# Altium PCB GWNv3_Station.PcbDoc
Units mil, origin at the board's own origin, x right, y up, seen from the top; angles counter-clockwise.
Board outline 3000 x 2400 mil, 2 copper layers (Top Layer, Bottom Layer); 56 components, 56 nets, 275 pads, 98 vias.
Unrouted connection lines stored in the file: 1.
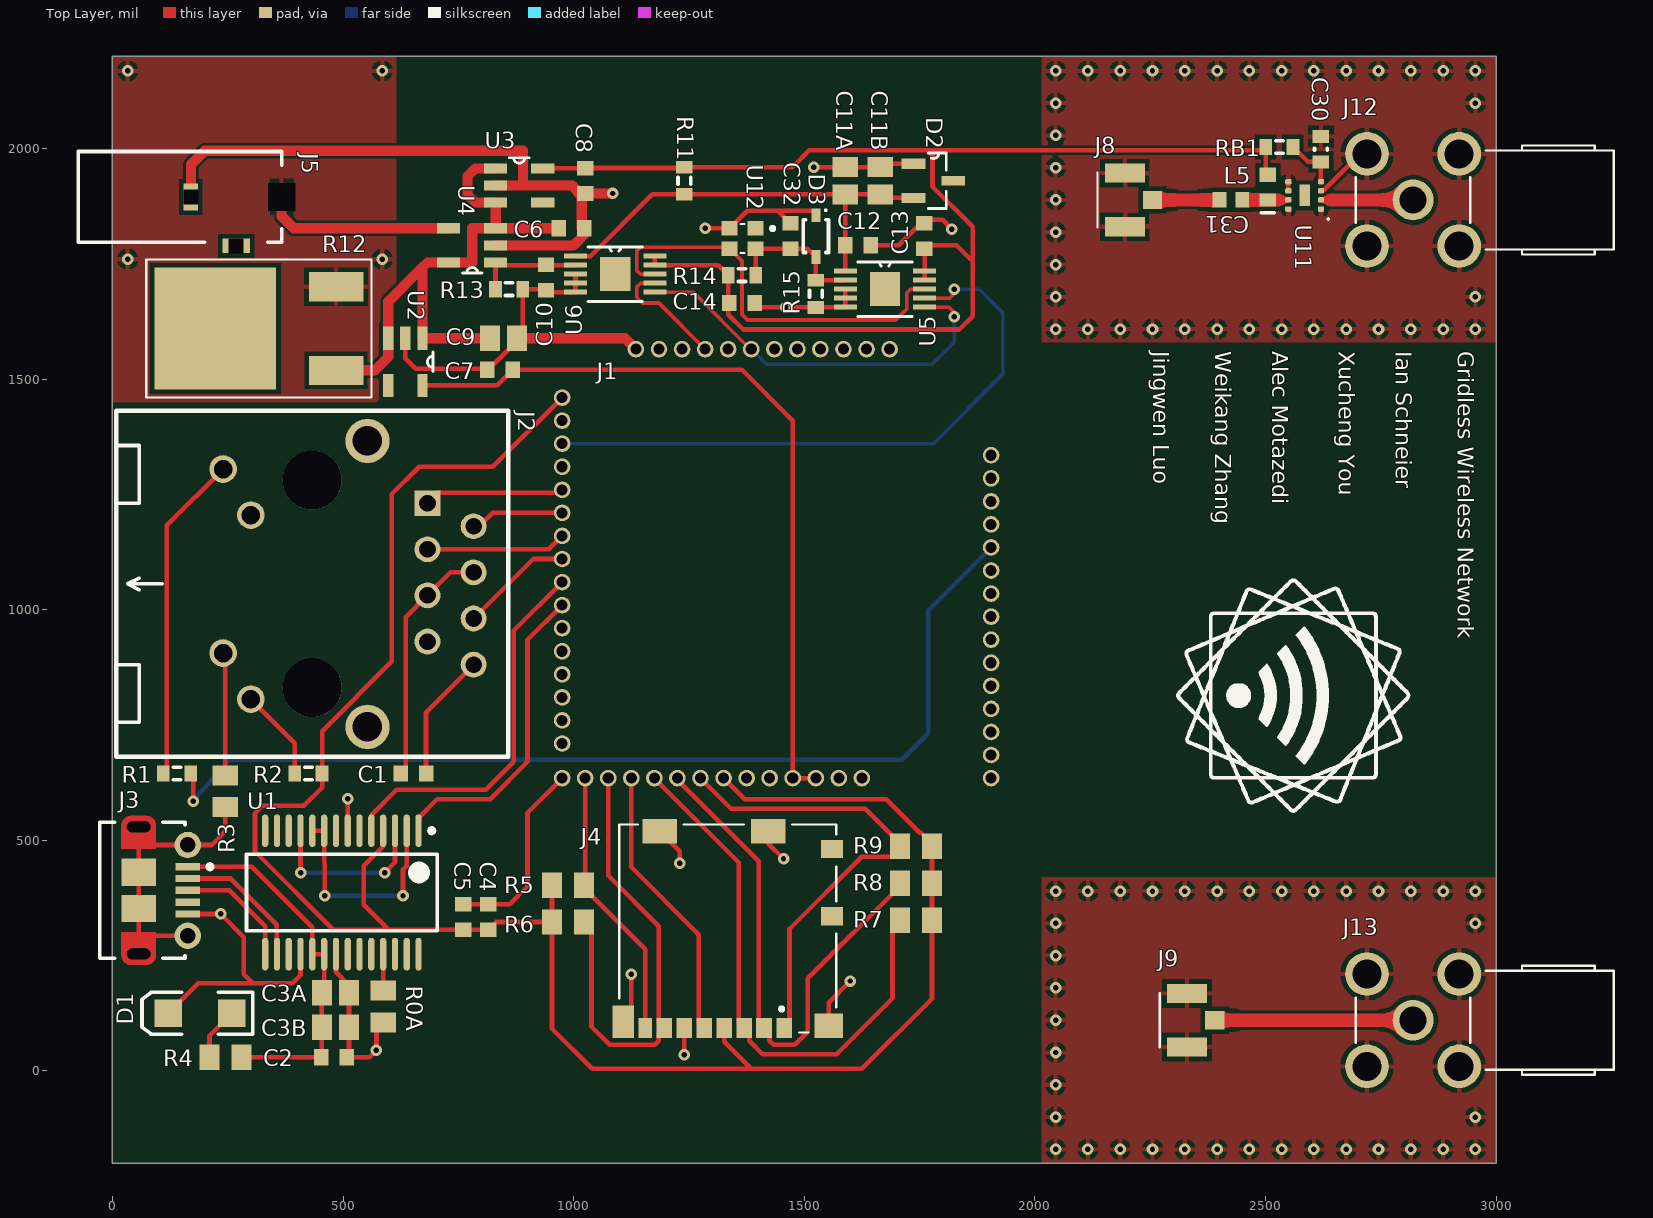
[diagram p0: Top Layer view]
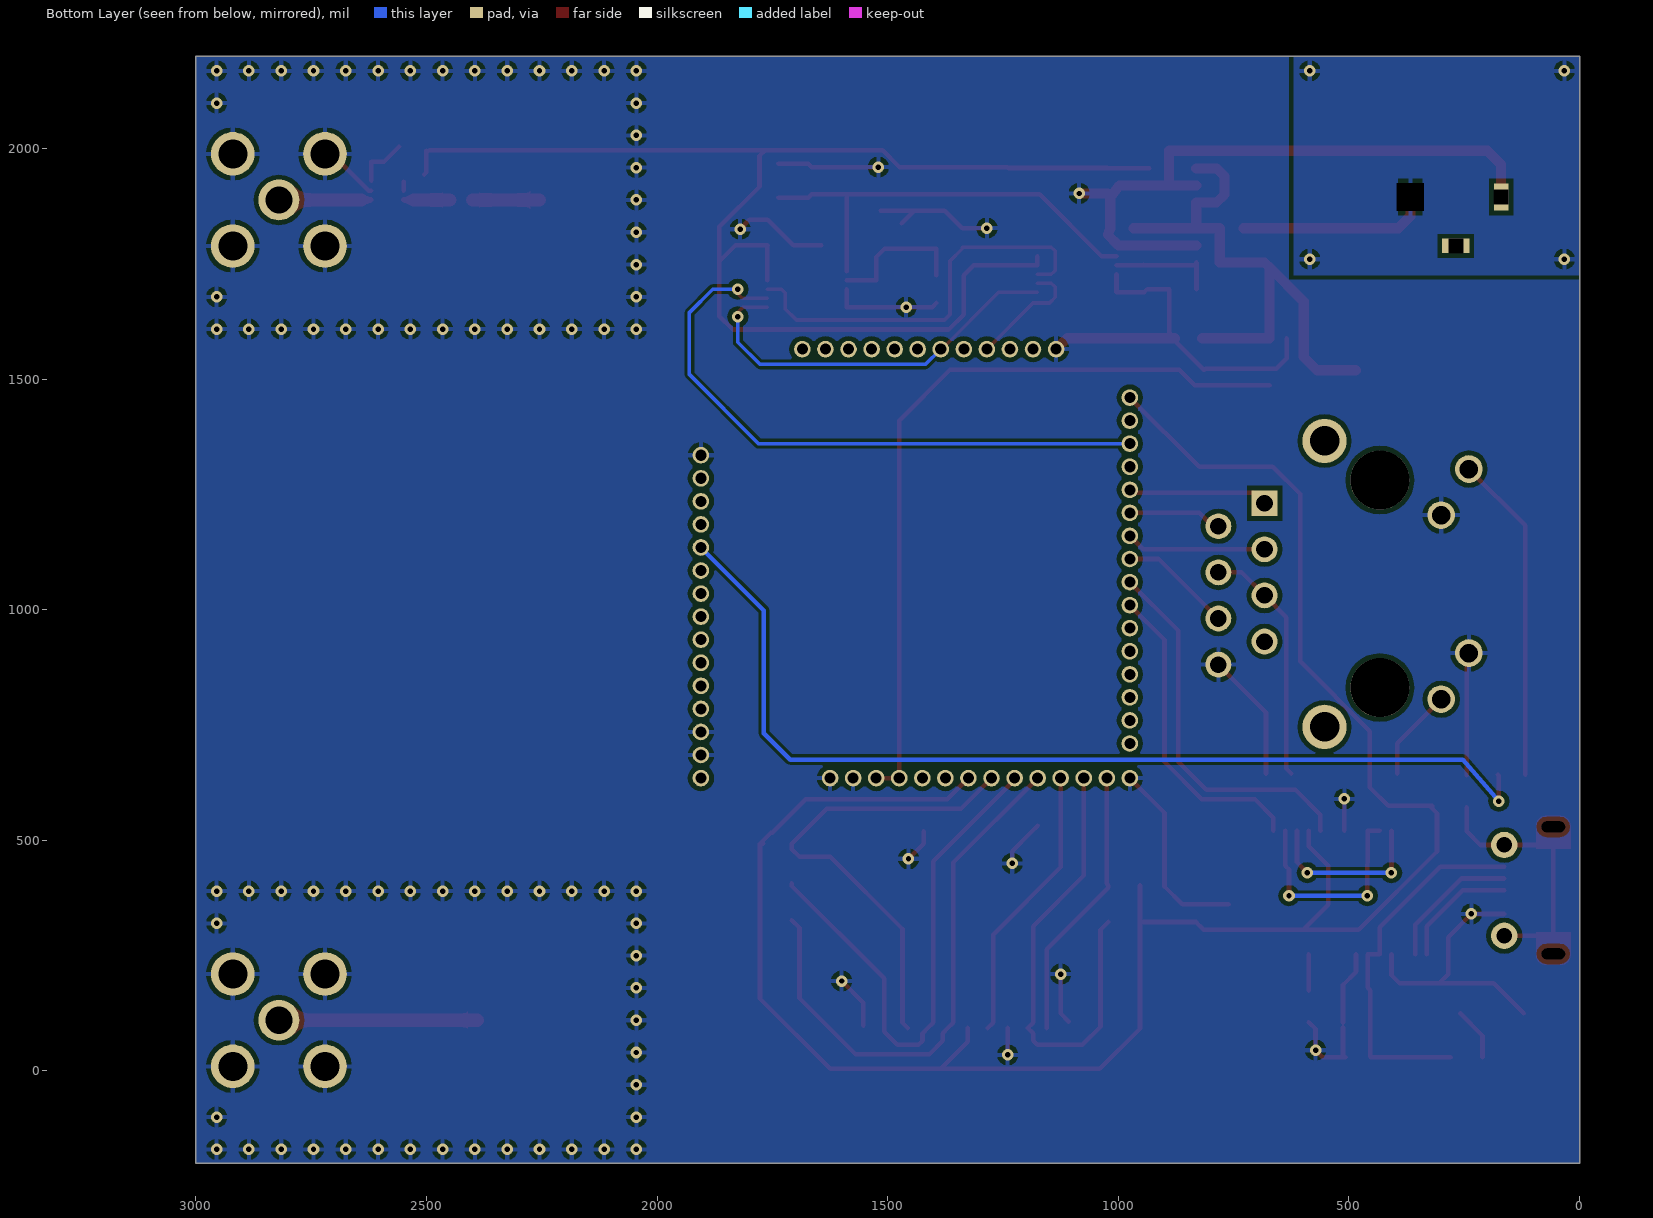
[diagram p1: Bottom Layer view, seen from below]

## Layer stack, top to bottom
Top Solder: solder mask 0.4, Solder Resist, Dk 3.5
Top Layer: signal copper 1.4
Dielectric 1: dielectric 12.6, FR-4, Dk 4.8
Bottom Layer: signal copper 1.4
Bottom Solder: solder mask 0.4, Solder Resist, Dk 3.5

## Board outline
0,-200 3000,-200 3000,2200 0,2200

## Design rules (kind name [scope] priority, off if disabled: settings)
Clearance [All] p1: gap=10 ignorepadtopadclearanceinfootprint=TRUE except(0: Arc-Hole Track-Hole SMDPad-Hole THPad-Hole Via-Hole Fill-Hole Poly-Hole Region-Hole Text-Hole; 1: SMDPad-Text; 6: Arc-Arc Arc-Track Arc-SMDPad Arc-THPad Arc-Via Arc-Fill Arc-Poly Arc-Region Arc-Text Track-Track Track-SMDPad Track-THPad Track-Via Track-Fill Track-Poly Track-Region Track-Text)
PolygonConnect [All] p1: connectstyle=Relief reliefconductorwidth=10 reliefentries=4 polygonreliefangle="90 Angle" airgapwidth=10
RoomDefinition Feedback [InComponentClass('Feedback')] p1: confinementstyle=ConfineIn formatcopy=TRUE lockcomponents=FALSE outline -88.09,1758.95 -88.09,2007.43 396.6,2007.43 396.6,2003.1 1863,2003.1 1863,1857 1800,1857 1800,1623 914.96,1623 914.96,1545.1 899.21,1545.1 899.21,1486.38 708,1486.38 708,1447.56 61.08,1447.56 61.08,1758.95
RoomDefinition BridgeRF [InComponentClass('BridgeRF')] p2: confinementstyle=ConfineIn formatcopy=TRUE lockcomponents=FALSE outline 1985,-200 3300,-200 3300,2200 1985,2200
RoomDefinition MCU [InComponentClass('MCU')] p3: confinementstyle=ConfineIn formatcopy=TRUE lockcomponents=FALSE outline -58.29,189.56 -58.29,578.26 -7,578.26 -7,1444.45 943,1444.45 943,1597 1937,1597 1937,592.83 1820.32,592.83 1820.32,265.12 1604.97,265.12 1604.97,31.1 539.21,31.1 539.21,-20 420.79,-20 420.79,-18.58 -7.51,-18.58 -7.51,189.56
RoutingVias [All] p1: holewidth=28 width=50 viastyle="Through Hole" minholewidth=12 minwidth=22 maxholewidth=28 maxwidth=50
SilkToSolderMaskClearance [IsPad vs IsFree] p1: minsilkscreentomaskgap=8 clearancetoexposedcopper=TRUE
SolderMaskExpansion [All] p1: expansion=4
UnRoutedNet [All] p1: checkbadconnections=TRUE
Width [All] p1: maxlimit=30 minlimit=7 preferedwidth=10
28 further rules are at their usual default settings.

## Classes and differential pairs
component class BridgeRF: C30 C31 J8 J9 J12 J13 L5 RB1 U11
component class MCU: C1 C2 C3A C3B C4 C5 D1 J1 J2 J3 J4 R0A R1 R2 R3 R4 R5 R6 R7 R8 R9 U1
component class Feedback: C6 C7 C8 C9 C10 C11A C11B C12 C13 C14 C32 D2 D3 J5 R11 R12 R13 R14 R15 U2 U3 U4 U5 U6 U12

## Components (designator, comment, footprint, x,y, rotation, side; value= is the part's Value field where it differs from the comment)
C1 "100nF" 1608[0603] 652.41,645 r0 top
C2 "100nF" 1608[0603] 480,30 r180 top
C3A "4.7uF" C0805 483.4,170 r180 top
C3B "4.7uF" C0805 483.4,95 r180 top
C4 "10nF" 1608[0603] 815,333.83 r270 top
C5 "100nF" 1608[0603] 760.59,333.83 r270 top
C6 "Cap" 1608[0603] 995,1827 r0 top value=1.0nF
C7 "Cap" 1608[0603] 840,1520 r0 top value=2.2nF
C8 "Cap" 1608[0603] 1025,1930 r90 top value=2.2nF
C9 "Cap" C0805 847.87,1588.56 r0 top value=10uF
C10 "100nF" 1608[0603] 940,1720 r90 top
C11A "Cap" C0805 1589,1930.05 r90 top value=10uF
C11B "Cap" C0805 1665,1930.05 r90 top value=10uF
C12 "Cap" 1608[0603] 1616.56,1790 r0 top value=100nF
C13 "Cap" 1608[0603] 1760,1810 r90 top value=100nF
C14 "Cap" 1608[0603] 1365,1665 r0 top value=100nF
C30 "10nF" CAPC0603(1608)100_L 2620,1998.43 r270 top
C31 "1pF" CAPC1608X90X35LL10T15 2425,1888.43 r0 top
C32 "Cap" 1608[0603] 1470,1810.31 r90 top value=100nF
D1 "LED2" 3.2X1.6X1.1 190,125 r180 top
D2 "LM4040DIM3-4_1" SOT95P237X112-3N 1780,1930 r0 top
D3 "D Zener" SODFL250X110-2N 1525,1810 r270 top
J1 "Vocore2  Mount" "Vocore2_Mount_One_Row_ No_Labels" 975,591 r0 top
J2 "J0011D01BNL" J00-00XXNL_J00-0061NL(Primary) 433,1056 r90 top
J3 "105017-0001" USB-MICRO-B_V 110.17,391.58 r270 top
J4 "104031-0811" MOLEX_104031-0811_104031-0811(Primary) 1333.98,297.94 r0 top
J5 "PJ-007" PJ-007 366.85,1895 r270 top
J8 "1909763-1" TE_1909763-1 2195,1888.43 r90 top
J9 "1909763-1" TE_1909763-1 2329.96,110 r90 top
J12 "5-1814400-1" CONN_5-1814400-1 2820,1888.43 r180 top
J13 "5-1814400-1" CONN_5-1814400-1 2820,110 r180 top
L5 "1.2nH" INDC1608L 2505,1915.98 r90 top
R0A "0" RESC2013X06N 586.98,140 r90 top
R1 "330" J1-0603 140,645 r180 top
R2 "330" J1-0603 425,645 r180 top
R3 "100" RESC2013X06N 245,606.62 r90 top
R4 "100" RESC2013X06N 245,30 r180 top
R5 "10K" RESC2012X07N_0805 987.59,403 r180 top value=10k
R6 "10K" RESC2012X07N_0805 987.59,323 r180 top value=10k
R7 "10K" RESC2012X07N_0805 1742.41,327 r0 top value=10k
R8 "10K" RESC2012X07N_0805 1742.41,407 r0 top value=10k
R9 "10K" RESC2012X07N_0805 1742.41,487 r0 top value=10k
R11 "Res3" J1-0603 1240,1930.05 r90 top value=100
R12 "0.1" TO-252-3 223.19,1609.67 r90 top
R13 "10k" J1-0603 860,1695 r0 top
R14 "15k" J1-0603 1365,1725.39 r0 top
R15 "15k" J1-0603 1525,1684.97 r90 top
RB1 "4k" J1-0603 2530,2003.43 r0 top
U1 "FT232RL-Reel" SSOP-28_L 497.41,387 r270 top
U2 "AP2204K-5.0TRG1" SOT95P280X145-5N 635,1537.56 r270 top
U3 "AP2204K-5.0TRG1" SOT95P280X145-5N 882,1920 r0 top
U4 "INA194AIDBVT" SOT95P280X145-5N 780,1790 r180 top
U5 "ADC141S628QIMMX/NOPB" SOP50P490X110-11N 1675,1695 r0 top
U6 "ADC141S628QIMMX/NOPB" SOP50P490X110-11N 1090,1727.56 r0 top
U11 "MAAL-011130" PQFN50P200X200X100_HS-9N 2585,1898.27 r180 top
U12 "SG-210STF_1.2000ML" OSCCC200X160X50 1366.38,1805 r180 top

## Footprints (in the part's own frame and the unit in brackets; to place one, negate y for a bottom-side part, rotate by r counter-clockwise, add the part's x,y. Pads: shape width x height; smd on the part's side, far side on the other; paste and mask are expansions set on the pad)
3.2X1.6X1.1 [mm] "SMT LED; 2 Flat Leads"
  rect 1.5x1.5 smd: 1(-1.75,0) 2(1.75,0)
  silkscreen extent -2.9,-1.15 3.2,1.15
1608[0603] [mm] "Chip Capacitor, Body 1.6x0.8mm, IPC High Density"
  rect 0.8x0.9 smd: 1(-0.7,0) 2(0.7,0)
  body extent -0.87,-0.48 0.87,0.48, height 1.3
C0805 [mm] "Chip Capacitor, Body 2.0x1.3mm, IPC High Density"
  rect 1.1x1.4 smd: 1(-0.75,0) 2(0.75,0)
  body extent -1.1,-0.72 1.1,0.72, height 1.4
CAPC0603(1608)100_L [mm] "Chip Capacitor, Body 1.6x0.8mm, Height 1.0mm, IPC High Density"
  rect 0.7x0.9 smd: 1(-0.7,0) 2(0.7,0)
  silkscreen extent -0.05,-0.35 0.05,0.35, body extent -0.87,-0.47 0.88,0.48, height 1
CAPC1608X90X35LL10T15 [mm] "Chip Capacitor, 2-Leads, Body 1.60x0.80mm, IPC High Density"
  rect 0.75x0.85 smd: 1(-0.625,0) 2(0.625,0)
  body extent -0.85,-0.45 0.85,0.45, height 0.9
CONN_5-1814400-1 [mm]
  round 2.4 hole 1.6: 1(2.54,2.54) 2(-2.54,2.54) 3(-2.54,-2.54) 4(2.54,-2.54)
  round 2.25 hole 1.5: 5(0,0)
  silkscreen extent -11.05,-3 3.15,3
INDC1608L [mm] "Chip Inductor, Body 1.6x0.8mm, IPC High Density"
  rect 0.723x0.9 smd: 1(-0.7,0)
  rect 0.8x0.9 smd: 2(0.7,0)
  silkscreen extent -1.4,-0.35 -1.4,0.35, body extent -0.87,-0.48 0.87,0.48, height 0.55
J00-00XXNL_J00-0061NL(Primary) [mil]
  rect 56x56 hole 36: 1(175,-250)
  round 56 hole 36: 2(125,-350) 3(75,-250) 4(25,-350) 5(-25,-250) 6(-75,-350) 7(-125,-250) 8(-175,-350)
  round 60 hole 40: 9(249,193) 10(149,133) 11(-150,193) 12(-250,133)
  round 128 hole 128 unplated: None(-225,0) None(225,0)
  round 96 hole 64: S1(-310,-120) S2(310,-120)
  silkscreen extent -375,-425 375,425
J1-0603 [mm] "Chip Resistor, Body 1.6x0.8mm, IPC High Density"
  rect 0.7x0.9 smd: 1(-0.75,0) 2(0.75,0)
  silkscreen extent -0.2,-0.35 0.2,0.35, body extent -0.85,-0.48 0.85,0.48, height 0.9
MOLEX_104031-0811_104031-0811(Primary) [mm]
  rect 0.85x1.1 smd: 1(3.105,-5.2) 3(0.905,-5.2) 4(-0.195,-5.2) 5(-1.295,-5.2) 6(-2.395,-5.2) 7(-3.495,-5.2)
  rect 0.875x1.1 smd: 2(2.005,-5.2)
  rect 0.75x1.1 smd: 8(-4.545,-5.2)
  rect 1.2x1 smd: 9(5.74,0.95) 10(5.74,4.65)
  rect 1.55x1.35 smd: G1(5.565,-5.075)
  rect 1.17x1.8 smd: G2(-5.755,-4.85)
  rect 1.9x1.35 smd: G3(-3.73,5.625) G4(2.24,5.625)
  silkscreen extent -5.97,-5.45 5.97,6
OSCCC200X160X50 [mm]
  rect 0.89x0.79 smd: 1(-0.715,-0.565) 2(0.715,-0.565) 3(0.715,0.565) 4(-0.715,0.565)
  silkscreen extent -1.75,-0.8 0.1,0.8
PJ-007 [mm]
  rect 1.5x0.8 hole 1.5 square: 1(0,0)
  rect 1.5x0.8 hole 0.8 square: 2(0,-5)
  rect 0.8x1.5 hole 0.8 square: 3(2.7,-2.5)
  silkscreen extent -2.5,-11.2 2.5,0
PQFN50P200X200X100_HS-9N [mm] "PQFN, 8-Leads, Body 2.00x2.00mm, Pitch 0.50mm, Thermal Pad 0.58x1.18mm, IPC Medium Density"
  rrect50% 0.35x0.3 smd: 1(-0.9,0.75) 2(-0.9,0.25) 3(-0.9,-0.25) 4(-0.9,-0.75) 5(0.9,-0.75) 6(0.9,-0.25) 7(0.9,0.25) 8(0.9,0.75)
  rect 0.58x1.18 smd: 9(0,0)
  silkscreen extent -1.35,1.25 -1.25,1.35, body extent -1,-1 1,1, height 0.25
RESC2012X07N_0805 [mm] "Chip Resistor, 2-Leads, Body 2.00x1.22mm, IPC Medium Density"
  rect 1.1x1.4 smd: 1(-0.875,0) 2(0.875,0)
  body extent -1.07,-0.7 1.08,0.7, height 0.65
RESC2013X06N [mm] "Chip Resistor, 2-Leads, Body 2.00x1.27mm, IPC Medium Density"
  rect 1.1x1.4 smd: 1(-0.875,0) 2(0.875,0)
  body extent -1.07,-0.7 1.08,0.7, height 0.65
SODFL250X110-2N [mm] "SODFL, 2-Leads, Body 1.25x2.50mm, IPC Medium Density"
  rect 0.75x0.5 smd: 1(-1.15,0) 2(1.15,0)
  silkscreen extent -1.47,-0.7 0.9,0.7, body extent -0.9,-0.67 0.9,0.67, height 1.1
SOP50P490X110-11N [mil]
  rect 50x11 smd: 1(-86,39) 2(-86,19.5) 3(-86,0) 4(-86,-19.5) 5(-86,-39) 6(86,-39) 7(86,-19.5) 8(86,0) 9(86,19.5) 10(86,39)
  rect 66x74 smd: 11(0,0)
  silkscreen extent -59,-59 59,59
SOT95P237X112-3N [mil]
  rect 52x22 smd: 1(-43,37) 2(-43,-37)
  rect 52x20 smd: 3(43,0)
  silkscreen extent -11,-60 28,60
SOT95P280X145-5N [mil]
  rect 50x22 smd: 1(-51,37) 2(-51,0) 3(-51,-37) 4(51,-37) 5(51,37)
  silkscreen extent -21,48 21,60
SSOP-28_L [mm] "SOP, 28-Leads, Body 10.2x5.3mm, Pitch 0.65mm, IPC High Density"
  oval 1.8x0.35 smd: 1(-3.4,4.225) 2(-3.4,3.575) 3(-3.4,2.925) 4(-3.4,2.275) 5(-3.4,1.625) 6(-3.4,0.975) 7(-3.4,0.325) 8(-3.4,-0.325) 9(-3.4,-0.975) 10(-3.4,-1.625) 11(-3.4,-2.275) 12(-3.4,-2.925) 13(-3.4,-3.575) 14(-3.4,-4.225) 15(3.4,-4.225) 16(3.4,-3.575) 17(3.4,-2.925) 18(3.4,-2.275) 19(3.4,-1.625) 20(3.4,-0.975) 21(3.4,-0.325) 22(3.4,0.325) 23(3.4,0.975) 24(3.4,1.625) 25(3.4,2.275) 26(3.4,2.925) 27(3.4,3.575) 28(3.4,4.225)
  silkscreen extent -3.52,-5.25 2.1,5.25, body extent -2.8,-5.25 2.8,5.25, height 2
TE_1909763-1 [mm]
  rect 1x1.05 smd: 1(0,-1.525)
  rect 1.05x2.2 smd: 2(-1.475,0) 3(1.475,0)
  silkscreen extent -1.5,1.5 1.5,1.5
TO-252-3 [mm]
  rect 1.6x3 smd: 1(-2.3,-6.65) 2(2.3,-6.65)
  rect 6.7x6.7 smd: PAD(0,0)
  silkscreen extent -3.8,-8.6 3.8,3.8
USB-MICRO-B_V [mm] "USB, MICRO B, Body 7.491x4.695 mm, Pitch 0.65 mm"
  rect 0.4x1.35 smd: 1(-1.3,1.35) 2(-0.65,1.35) 3(0,1.35) 4(0.65,1.35) 5(1.3,1.35)
  round 1.45 hole 0.85: 6(-2.5,1.35) 7(2.5,1.35)
  rrect50% 0x0 hole 0.6 slot 1.3 at 90 deg: 8(-3.5,-1.35) 11(3.5,-1.35)
  rect 1.5x1.9 smd: 9(-1,-1.35) 10(1,-1.35)
  Top Layer circle w0.5: c-3.6,-1.8 r0.25
  Top Layer circle w0.5: c3.6,-1.8 r0.25
  Top Layer circle w0.5: c3.6,-0.9 r0.25
  Top Layer region: -3.6,-1.8 -3.6,-0.9 -4.1,-0.9 -4.1,-1.8
  Top Layer region: 3.6,-0.9 3.6,-1.8 4.1,-1.8 4.1,-0.9
  Top Layer region: 2.3,-0.4 2.3,-2.3 3.6,-2.3 3.6,-0.4
  Top Layer region: -2.3,-2.3 -2.3,-0.4 -3.6,-0.4 -3.6,-2.3
  Top Layer lines w0.5: -3.546,-1.144 cw(c-3.6,-0.9) -3.6,-0.65 ; -3.546,-1.144 cw(c-3.6,-0.9) -3.6,-0.65 ; -3.546,-1.144 ccw(c-3.6,-0.9) -3.6,-0.65 ; -3.546,-1.144 ccw(c-3.6,-0.9) -3.437,-1.089 ccw(c-3.6,-0.9) -3.6,-0.65
  silkscreen extent -3.75,-3.5 3.75,2.7, body extent -4.1,-3.9 4.1,1.5, height 2.67
"Vocore2_Mount_One_Row_ No_Labels" [mil]
  round 36 hole 24: 1(0,869) 2(0,819) 3(0,769) 4(0,719) 5(0,669) 6(0,619) 7(0,569) 8(0,519) 9(0,469) 10(0,419) 11(0,369) 12(0,319) 13(0,269) 14(0,219) 15(0,169) 16(0,119) 17(0,44) 18(50,44) 19(100,44) 20(150,44) 21(200,44) 22(250,44) 23(300,44) 24(350,44) 25(400,44) 26(450,44) 27(500,44) 28(550,44) 29(600,44) 30(650,44) 31(930,44) 32(930,94) 33(930,144) 34(930,194) 35(930,244) 36(930,294) 37(930,344) 38(930,394) 39(930,444) 40(930,494) 41(930,544) 42(930,594) 43(930,644) 44(930,694) 45(930,744) 46(710,974) 47(660,974) 48(610,974) 49(560,974) 50(510,974) 51(460,974) 52(410,974) 53(360,974) 54(310,974) 55(260,974) 56(210,974) 57(160,974)

## Part data
C1 C2 C3A C3B C4 C5 C6 C7 C8 C9 C10 C11A C11B C12 C13 C14 C32: library part "Cap Semi", "Capacitor (Semiconductor SIM Model)", LatestRevisionDate=29-May-2009, LatestRevisionNote="IPC-7351 Footprint Added.", PackageDescription="Chip Capacitor", PackageReference=C1206, Published=8-Jun-2000, Publisher="Altium Limited"
C30: library part CMP-1035-02302-1, "CAP 10nF 6.3V ±10% 0603 (1608 Metric) Thickness 1mm SMD", Case-EIA=0603, Case-Metric=1608, Rated Voltage="6.3 V", Tolerance=±10%, Max Thickness="1 mm", Technology=SMT
C31: library part CMP-2006-02464-1, Manufacturer=Murata, Part Number=GRM1885C1H1R0CA01D
D1: "Typical RED, GREEN, YELLOW, AMBER GaAs LED", LatestRevisionDate=17-Jul-2002, LatestRevisionNote="Re-released for DXP Platform.", PackageDescription="SM LED; 2 Flat Leads", PackageReference=3.2X1.6X1.1, PackageVersion=Feb-2002, Published=8-Jun-2000, Publisher="Altium Limited"
D2: "IC VREF SHUNT 4.096V SOT23", Package="SOT23 Texas Instruments", Supplier Part Number 1=LM4040DIM3-4.1/NOPBCT-ND, Availability=Good, MF="Texas Instruments", MP=LM404DIM4-4.1, Price="0.41 USD", Supplier 1=Digi-Key
D3: "Zener Diode", LatestRevisionDate=17-Jul-2002, LatestRevisionNote="Re-released for DXP Platform.", PackageDescription="Diode, Thru-Hole; 2 Leads; 0.7 in Pin Spacing", PackageReference=DIODE-0.7, Published=8-Jun-2000, Publisher="Altium Limited"
J1: library part Vocore2_Pins
J2: "CONN MAGJACK 1PORT 100 BASE-TX", Manufacturer="Pulse Electronics Network", Supplier Part Number 1=553-1483-ND, Manufacturer Part Number=J0011D01BNL, Supplier 1=Digi-Key, URL=https://www.digikey.com/short/q8f3j9
J3: library part CMP-2000-05827-1, "Micro-USB B Receptacle, Right Angle, Bottom Mount, Surface Mount, with Solder Tabs, -30 to 85 degC, 5-Pin USB, RoHS, Tape and Reel", Manufacturer=Molex, Package Description="5-Leads USB, Micro B, Body 7.5 x 5 mm, Pitch 0.65 mm", Package Reference=MICRO-B, Package Version="Rev. F, 12/2012", Standard Package=1, Voltage - Max=30V, 3D Model=105017-0001.stp, Catalog Drawings=1050170001, Category=Connectors,Interconnects, Circuits=5, Connector Type=USB-microB, Datasheet URL=http://www.molex.com/elqNow/elqRedir.htm?ref=http://www.molex.com/webdocs/datasheets/pdf/en-us/1050170001_IO_CONNECTORS.pdf, Datasheet Version=03/2016, Family=USB,DVI,HDMIConnectors, Featured Product=Micro-USBConnectorsUSBConnectors, Features=Shielded,SolderRetention, Gender=Receptacle, Ingress Protection=-, Manufacturer URL=http://www.molex.com/, Mating Products=WM17145-ND-CABLEMICROUSBBTOSTDA1.0MWM17147-ND-CABLEMICROUSBBTOSTDA2.0MWM17146-ND-CABLEMICROUSBBTOSTDA1.5M, Mounting Technology=SurfaceMount, Mounting Type=BoardCutout,SurfaceMount,RightAngle, Number of Contacts=5, Online Catalog=Molex-MicroUSB, Other Names=WM1399DKR, Package URL=http://www.molex.com/pdm_docs/sd/1050170001_sd.pdf, Packaging=Digi-Reel®, PCN Assembly/Origin=ResinSupplier21/Oct/2015, RoHS Information=1050170001CertofCompliance, Series=-, Specifications=-
J4: "1.10mm Pitch microSD Memory Card Connector, SMT, Push-Pull Type, 1.42mm Height, with Detect Switch", Manufacturer=Molex, Supplier Part Number 1=WM6357CT-ND, Manufacturer Part Number=104031-0811, Part Number=104031-0811, Supplier=Arrow, Supplier 1=Digi-Key, URL=https://www.arrow.com/en/products/1040310811/molex?utm_source=octopart&utm_medium=aggregator&utm_campaign=octopart_2017&utm_content=inv_listing&utm_keyword=1040310811
J5: "1.3 mm Center Pin, 1.0 A, Right Angle, Through Hole, Dc Power Jack Connector", Package=None, Availability=Good, MF=CUI, MP=PJ-007, Price="0.36 USD", SnapEDA_Link=https://www.snapeda.com/parts/PJ-007/CUI/view-part/?ref=snap
J8 J9: "CONN UMCC JACK STR 50OHM SMD", Package=None, Availability=Good, MF="TE Connectivity", MP=1909763-1, Number_of_Positions=1, Price="0.28 USD"
J12 J13: "SMA R/A PCB Skt GZD", Package=None, Digi-Key_Part_Number=A97593-ND, Digi-Key_Purchase_URL=https://www.digikey.com/product-detail/en/te-connectivity-amp-connectors/5-1814400-1/A97593-ND/1755981?WT.z_cid=ref_snapeda&utm_source=snapeda&utm_medium=aggregator&utm_campaign=buynow, EU_RoHS_Compliance=Compliant, Link=http://www.te.com/usa-en/product-5-1814400-1.html, MF="TE Connectivity", MP=5-1814400-1, Number_of_Positions=1, SnapEDA_Link=https://www.snapeda.com/symbols-footprints/5-1814400-1/TE%20Connectivity%20AMP%20Connectors/view-part/?ref=snap
L5: library part Inductor, "Inductor", Manufacturer=Murata, Part Number=LQG15WH1N2S02D
R0A R1 R2 R3 R4 R5 R6 R7 R8 R9 R12 R13 R14 R15 RB1: library part Res3, "Resistor", LatestRevisionDate=29-May-2009, LatestRevisionNote="IPC-7351 Footprint Added.", PackageDescription="Chip Resistor", PackageReference=J1-0603, Published=8-Jun-2000, Publisher="Altium Limited"
R11: "Resistor", LatestRevisionDate=29-May-2009, LatestRevisionNote="IPC-7351 Footprint Added.", PackageDescription="Chip Resistor", PackageReference=J1-0603, Published=8-Jun-2000, Publisher="Altium Limited"
U1: library part CMP-0078-00029-3, "USB UART Asynchronous Serial Data Transfer Chip, 28-pin SSOP, Tape and Reel", Manufacturer=FTDI, ComponentLink1Description="Manufacturer URL", ComponentLink1URL=http://www.ftdichip.com/, ComponentLink2Description=Datasheet, ComponentLink2URL=http://www.ftdichip.com/Support/Documents/DataSheets/ICs/DS_FT232R.pdf, DatasheetVersion="ver 2.10, Mar-2012", PackageDescription="28-Pin Small Outline Package 0.65 mm Pitch", PackageReference=SSOP-28, PackageVersion=Mar-12, PartNumber=FT232RL-Reel, RevisionNote="DatasheetVersion updated to 2.10 Mar-2012"
U2 U3: "IC REG LINEAR 5V 150MA SOT23-5", Package="SOT-23-5 Diodes Inc.", Availability=Good, MF="Diodes Inc.", MP=AP2204K-5.0TRG1, Price="0.20 USD"
U4: "IC CURRENT MONITOR 3% SOT23-5", Package="SOT-23 Texas Instruments", Availability=Good, MF="Texas Instruments", MP=INA194AIDBVT, Price="1.55 USD"
U5 U6: "IC CONVERTER A/D 14-BIT 10-MSOP", Package="MSOP-10 Texas Instruments", Availability=Good, MF="Texas Instruments", MP=ADC141S628QIMMX/NOPB, Price="4.07 USD"
U12: "Spxo 1.6-3.6v 50ppm -40/+85c", Package="SMD-4 Epson", Availability=Bad, MF=EPSON, MP="SG-210STF 1.2000ML", Price="1.41 USD", SnapEDA_Link=https://www.snapeda.com/symbols-footprints/SG-210STF%201.2000ML/EPSON/view-part/?ref=snap

## Via types
v1: diameter 25, hole 11.81, Top Layer to Bottom Layer, 98 vias

## Nets (pads, with @x,y where several pads share a name; then routed paths per layer and width w, separated by ;. In a path a pad name is that pad's centre, name@x,y a point inside that pad or via, vN(x,y) a via of type N, cw(c..) or ccw(c..) an arc to the next point about the centre after c; other vN are vias at no path point)
3V3: C4.2 C5.2 J1.1 J1.24 J4.4 R2.1 R5.2 R6.2 R7.2 R8.2 R9.2 U1.4 | length 4587.1
  Top Layer w10: U1.4 586.98,486.95 545,444.97 545,360 598.73,306.27 ; R5.2 R6.2 ; J1.1 825,1310 665,1310 605.9,1250.9 605.9,888 454.53,736.62 R2.1 454.53,614.53 415,575 320,575 320,569.29 309.18,558.47 309.18,475.82 478.73,306.27 598.73,306.27 ; J1.24 1371.13,588.87 1677.97,588.87 1750.2,516.63 1753.13,516.63 1776.86,492.91 R9.2 ; J4.4 1326.31,63.69 1385,5 ; R9.2@1770.2,493.65 R9.2 ; 598.73,306.27 C5.2 C4.2 831.73,323 R6.2 ; R6.2 953.14,91.86 1040,5 1385,5 ; 1385,5 1625,5 1776.86,156.86 R7.2 R8.2 R9.2
5V_MCU: C7.2 J1.27 J1.28 U2.5 | length 1687.4
  Top Layer w10: U2.5 834.12,1486.56 C7.2 1365,1520 1475,1410 J1.27 J1.28
5V_RF: C8.2 C13.1 C14.1 L5.2 R11.2 R14.1 RB1.1 U3.5 U5.9 U5.10 U6.9 U6.10 | length 3063.6
  Top Layer w10: U3.5 1021.95,1957 1022.56,1957.61 1238.03,1957.61 R11.2 1474.58,1959.58 1511.23,1996.23 1765.98,1996.23 ; U6.9 1313.81,1747.06 R14.1 1335.47,1665 1335.47,1639.53 1367.5,1607.5 1836.39,1607.5 1865,1636.11 1865,1755 ; U6.9@1176,1748.06 U6.10 ; U5.9 U5.10 1761,1789 1760,1790 1830,1790 1865,1755 ; L5.2 2500.47,1948.07 2500.47,1995 2497.97,1992.5 2494.24,1996.23 1765.98,1996.23 ; 1765.98,1996.23 1778,1984.21 1778,1917 1865,1830 1865,1755
12V: C6.1 C9.1 R12.1 U2.1 U2.3 U3.1 U3.3 U4.3 U4.5 | length 1255.5
  Top Layer w22: R12.1 569.12,1519.12 598,1548 U2.3 598,1668 672,1742 ; C9.1 U2.1 672,1742 ; U3.1 787,1957 770,1940 770,1900 787,1883 U3.3 U4.3 ; C6.1 U4.3 ; 672,1742 683,1753 U4.5 780,1753 780,1827 U4.3
ADC_I: J1.54 U6.7 | length 259.5
  Top Layer w8: U6.7 1145.2,1708.06 1137,1699.86 1137,1677.26 1149.26,1665 1185,1665 J1.54
ADC_V: J1.3 U5.7 | length 1355.4
  Top Layer w8: U5.7 1815.5,1675.5 1825,1685 v1(1825,1695)
  Bottom Layer w8: J1.3 1780,1360 1930,1510 1930,1644.27 1879.27,1695 v1(1825,1695)
CSB: J1.52 U5.6 U6.6 | length 867.3
  Top Layer w8: U6.6 1259.57,1688.56 1383.13,1565 J1.52 ; U5.6 1814,1656 1825,1645 v1(1825,1635)
  Bottom Layer w8: J1.52 1418,1532 1777,1532 1825,1580 v1(1825,1635)
GND: C1.2 C2.1 C3A.1 C3B.1 C4.1 C5.1 C6.2 C7.1 C8.1 C9.2 C10.1 C11A.2 C11B.2 C12.2 C13.2 C14.2 C30.1 C32.2 D1.2 D2.1 D3.1 J1.17 J1.29 J1.30 J1.32 J1.33 J1.45 J1.57 J2.8 J2.10 J2.11 J3.5 J4.6 J4.G1 J4.G2 J4.G3 J4.G4 J5.2 J8.2 J8.3 J9.2 J9.3 J12.1 J12.2 J12.3 J12.4 J13.1 J13.2 J13.3 J13.4 R0A.1 R3.2 R13.2 R15.1 U1.7 U1.18 U1.21 U2.2 U3.2 U4.2 U5.3 U5.4 U5.5 U6.3 U6.4 U6.5 U11.1 U11.3 U11.5 U11.6 U11.8 U12.2 | length 5883
  Top Layer w10: D1.2 186.4,190.3 304.7,190.3 ; J3.5 v1(234.61,340.39) 285,290 285,210 304.7,190.3 ; J2.11 245,901 R3.2 ; U1.18 407.84,207.78 390.36,190.3 304.7,190.3 ; U1.21 484.61,214.69 512.93,186.37 C3A.1 C3B.1@512.93,105 ; v1(510,590) 510,521.06 U1.7 ; C3B.1 512.93,35.37 C2.1 557.42,30 v1(572.42,45) 572.42,90.99 R0A.1 ; U2.2 635,1545 657.44,1522.56 809.88,1522.56 C7.1 814.56,1520 877.4,1582.85 C9.2 889.53,1600.69 R13.2 937.44,1695 C10.1 943.88,1688.56 U6.5 U6.4 U6.3 ; C1.2 679.97,777.97 J2.8 ; C5.1 C4.1 861.39,361.39 900,400 900,560 J1.17 ; C8.1@1017.56,1894.69 C8.1@1022.56,1902.49 ; J4.G2 1125,124.59 v1(1125,210) ; J1.57@1127.56,1565 J1.57 ; J4.G3@1175,531.54 J4.G3 1230,476.54 v1(1230,450) ; J4.6 1240,92.91 v1(1240,35) ; v1(1285,1827.24) U12.2 1375.98,1865 1442.87,1865 ; C14.2@1394.53,1665 1403.53,1656 v1(1460,1656) U5.5 U5.4 U5.3 ; J4.G4 1422.17,492.83 v1(1455,460) ; C32.2 1442.87,1865 ; D3.1@1515.28,1865 1442.87,1865 ; v1(1520.42,1959.58) C11A.2 C11B.2 1672.42,1967 D2.1 ; J4.G1 1553.08,148.08 v1(1600,195) ; C12.2 1704.88,1790 1760,1845.12 1799.88,1845.12 v1(1820,1825) ; U11.6 U11.5 ; U11.3 2625.5,1908.11 2705.82,1988.43 J12.4
  Top Layer w22: J5.2 170,1965 200,1995 890,1995 890,1920 ; U4.2 1000,1790 1022.56,1812.56 1017.56,1827 1017.56,1894.69 997.24,1920 890,1920 ; U3.2 890,1920 ; C9.2 1111.44,1588.56 J1.57 ; C8.1@1022.56,1902.49 v1(1085,1902.49)
  other v1: 2045,-170 2115,-170 2185,-170 2255,-170 2325,-170 2395,-170 2465,-170 2535,-170 2605,-170 2675,-170 2745,-170 2815,-170 2885,-170 2955,-170 2045,-100 2955,-100 2045,-30 2045,40 2045,110 2045,180 2045,250 2045,320 2955,320 2045,390 2115,390 2185,390 2255,390 2325,390 2395,390 2465,390 2535,390 2605,390 2675,390 2745,390 2815,390 2885,390 2955,390 2045,1608.43 2115,1608.43 2185,1608.43 2255,1608.43 2325,1608.43 2395,1608.43 2465,1608.43 2535,1608.43 2605,1608.43 2675,1608.43 2745,1608.43 2815,1608.43 2885,1608.43 2955,1608.43 2045,1678.43 2955,1678.43 2045,1748.43 2045,1818.43 2045,1888.43 2045,1958.43 2045,2028.43 2045,2098.43 2955,2098.43 2045,2168.43 2115,2168.43 2185,2168.43 2255,2168.43 2325,2168.43 2395,2168.43 2465,2168.43 2535,2168.43 2605,2168.43 2675,2168.43 2745,2168.43 2815,2168.43 2885,2168.43 2955,2168.43
LED_CTRL: J1.41 R1.1 | length 2175.6
  Top Layer w10: v1(175,585) 175,640.06 R1.1@176.94,642
  Bottom Layer w10: v1(175,585) 253.16,675 1711.67,675 1768.42,731.75 1768.42,998.42 J1.41
NetC1_1: C1.1 J2.4 J2.5 | length 530.8
  Top Layer w10: C1.1 635.6,655.75 635.6,983.6 J2.5 733,1081 J2.4
NetC10_2: C10.2 R13.1 U4.1 U6.2 | length 231.4
  Top Layer w10: R13.1 830.47,1752.47 U4.1 ; U4.1@831,1747.06 C10.2@945,1747.06 ; C10.2@945,1747.56 945.5,1747.06 U6.2
NetC15_1: 
NetC15_2: 
NetC16_2: 
NetC17_2: 
NetC18_2: 
NetC21_1: 
NetC21_2: 
NetC22_1: 
NetC22_2: 
NetC23_2: 
NetC26_2: 
NetC27_1: 
NetC27_2: 
NetC30_2: C30.2 RB1.2 U11.4 | length 114.8
  Top Layer w10: RB1.2 2592.09,1970.87 C30.2 U11.4@2620,1930
NetC31_1: C31.1 J8.1 | length 145.4
  Top Layer w28.46: J8.1 C31.1
NetC31_2: C31.2 L5.1 U11.7 | length 100
  Top Layer w11.81: 2528.43,1888.43 U11.7
  Top Layer w28.46: C31.2 L5.1 2528.43,1888.43
NetC32_1: C32.1 D3.2 R14.2 R15.2 U5.2 U12.4 | length 309.5
  Top Layer w10: R14.2 U12.4 C32.1 1506.97,1782.76 D3.2 R15.2 U5.2
NetD1_1: D1.1 R4.2 | length 115
  Top Layer w10: R4.2 210.55,76.65 D1.1
NetJ2_9: J2.9 R1.2 | length 713.6
  Top Layer w10: R1.2@117.88,642 117.88,1182.88 J2.9
NetJ2_12: J2.12 R2.2 | length 200.5
  Top Layer w10: J2.12 395.47,710.53 R2.2
NetJ3_2: J3.2 U1.16 | length 298.5
  Top Layer w10: J3.2 256.12,417.17 356.66,316.62 U1.16
NetJ3_3: J3.3 U1.15 | length 260.7
  Top Layer w10: J3.3 253.43,391.57 331.07,313.93 U1.15
NetJ3_6: J3.6 J3.7 J3.8 J3.9 J3.10 J3.11 R3.1 | length 640.4
  Top Layer w10: J3.11 57.02,295 ; J3.8@65.13,531.17 57.02,523.06 57.02,490 ; J3.7 58.87,293.15 57.02,295 ; R3.1 245,520 215,490 J3.6 57.02,490 ; 57.02,295 J3.10 J3.9 57.02,490
NetJ5_1: J5.1 R12.2 U4.4 | length 414.8
  Top Layer w22: J5.1 366.85,1853.15 393,1827 U4.4
  other v1: 33.05,1760 585,1760 33.05,2168.43 585,2168.43
NetJ9_1: J9.1 J13.5 | length 430
  Top Layer w28.46: J9.1 J13.5
NetJ12_5: J12.5 U11.2 | length 199.6
  Top Layer w11.81: U11.2 2641.57,1888.43
  Top Layer w28.46: 2641.57,1888.43 J12.5
NetR0A_2: R0A.2 U1.25 | length 78.7
  Top Layer w10: R0A.2 U1.25
NetRB5_2: 
NetU1_2: U1.2 U1.9 U1.10 | length 480.7
  Top Layer w10: U1.10 U1.9 v1(460,380) ; v1(630,380) 630,436.84 638.16,445 U1.2
  Bottom Layer w10: v1(460,380) v1(630,380)
NetU1_3: U1.3 U1.11 | length 371.1
  Top Layer w10: v1(407.84,430) U1.11 ; v1(590,430) 612.57,452.57 U1.3
  Bottom Layer w10: v1@410,430 v1(590,430)
P0_R+: J1.5 J2.1 | length 304
  Top Layer w10: J2.1 706,1254 961.96,1254 967.96,1260 J1.5
P0_R-: J1.6 J2.2 | length 204
  Top Layer w10: J2.2 795.45,1181 824.45,1210 J1.6
P0_T+: J1.7 J2.3 | length 304
  Top Layer w10: J2.3 946,1131 J1.7
P0_T-: J1.8 J2.6 | length 245.4
  Top Layer w10: J2.6 912,1110 J1.8
RXD2: J1.10 U1.1 | length 685.8
  Top Layer w10: U1.1 663.75,549.4 703.63,589.28 819.28,589.28 900,670 900,935 J1.10
SCLK: U5.8 U6.8 U12.3 | length 895.1
  Top Layer w8: U6.8 1145.2,1727.56 1137,1735.76 1137,1777.86 1145.2,1786.06 1338.23,1786.06 U12.3 1365,1755.98 1365,1640 1376.78,1628.22 1698.02,1628.22 1722,1652.2 1722,1686.8 1730.2,1695 U5.8
SD0: J1.18 J4.8 R5.1 | length 598.1
  Top Layer w10: J1.18 1025,405.96 R5.1 1022.04,397.09 1155.05,264.09 J4.8
SD1: J1.19 J4.7 R6.1 | length 1024.7
  Top Layer w10: R6.1 1038.69,306.35 1038.69,96.04 1078.16,56.57 1176.02,56.57 1184.81,65.35 1184.81,81.65 J4.7 1184.81,104.8 1184.81,314.01 1075,423.82 J1.19
SD2: J1.20 J4.5 | length 607.2
  Top Layer w10: J1.20 1125,442.13 1271.43,295.71 1271.43,104.8 J4.5
SD3: J1.21 J4.3 R7.1 | length 1203.5
  Top Layer w10: J1.21 1358.04,451.96 1358.04,104.8 J4.3 1380.7,82.14 1380.7,65.35 1409.48,36.57 1569.8,36.57 1691.31,158.07 1691.31,310.35 R7.1
SD4: J1.22 J4.2 R8.1 | length 1155.8
  Top Layer w10: J1.22 1225,631.39 1401.35,455.04 1401.35,104.8 J4.2 1424.5,81.65 1424.5,65.35 1433.28,56.57 1479.17,56.57 1507.57,84.96 1507.57,200.7 1707.96,401.09 R8.1
SD5: J1.23 J4.1 R9.1 | length 1034.9
  Top Layer w10: J1.23 1341.13,568.87 1632,568.87 1707.96,492.91 R9.1 1707.96,481.09 1691.31,464.44 1624.54,464.44 1467.96,307.86 1467.96,104.95 J4.1
TXD2: J1.9 U1.5 | length 823.7
  Top Layer w10: U1.5 562.11,521.58 562.11,555.49 615.9,609.28 809.28,609.28 870,670 870,955 J1.9
VBUS: C2.2 C3A.2 C3B.2 J3.1 R4.1 U1.19 U1.20 | length 807.3
  Top Layer w10: J3.1 302.24,442.76 433.43,311.57 U1.19 U1.20 459.02,180.15 453.87,175 C3A.2 C3B.2 453.87,31.43 C2.2 R4.1
VREF: C11A.1 C11B.1 C12.1 D2.2 R11.1 U5.1 U6.1 | length 958.1
  Top Layer w10: U6.1 1036.56,1766.56 1170.52,1900.52 R11.1 C11A.1 ; U5.1 C12.1 C11A.1 ; D2.2 1672.52,1893 C11B.1 C11A.1
pads on no net: D2.3 J1.2 J1.4 J1.11 J1.12 J1.13 J1.14 J1.15 J1.16 J1.25 J1.26 J1.31 J1.34 J1.35 J1.36 J1.37 J1.38 J1.39 J1.40 J1.42 J1.43 J1.44 J1.46 J1.47 J1.48 J1.49 J1.50 J1.51 J1.53 J1.55 J1.56 J2.7 J2.None J2.S1 J2.S2 J3.4 J4.9 J4.10 J5.3 R12.PAD U1.6 U1.8 U1.12 U1.13 U1.14 U1.17 U1.22 U1.23 U1.24 U1.26 U1.27 U1.28 U2.4 U3.4 U5.11 U6.11 U11.9 U12.1

## Polygon pours and split planes (outlines as drawn)
NetJ5_1 on Top Layer "12V Input" (solid, remove dead copper, pour order 16): 0,2200 0,1450 615,1450 615,2200
GND on Top Layer "Transceiver GND" (solid, remove dead copper, pour order 6): 3000,-200 2015,-200 2015,420 3000,420
GND on Top Layer "Reciever GND" (solid, remove dead copper, pour order 0): 3000,1580 2015,1580 2015,2200 3000,2200
GND on Bottom Layer "Bottom Layer-GND" (solid, remove dead copper, pour order 20): 0,-200 3000,-200 3000,2200 630,2200 630,1715 0,1715
NetJ5_1 on Bottom Layer "Bottom Layer-Pwr" (solid, remove dead copper, pour order 22): 0,2200 630,2200 630,1725 0,1725

## Silkscreen, mask and mechanical layers (free items; w line width, h text height)
Top Overlay:
  drawing of 3081 lines, arcs and shapes, not listed
  text "Jingwen Luo" at 2245,1560 h60 r270
  text "Weikang Zhang" at 2379.13,1560 h60 r270
  text "Alec Motazedi" at 2502.58,1560 h60 r270
  text "Xucheng You" at 2647.39,1560 h60 r270
  text "Ian Schneier" at 2770.93,1560 h60 r270
  text "Gridless Wireless Network" at 2905,1560 h60 r270
Mechanical 2:
  the board outline again, w10
Drill Drawing:
  lines w10: 2400,-200 3000,-200